# EAGLE board PIC32 (EAGLE 8.1.0)
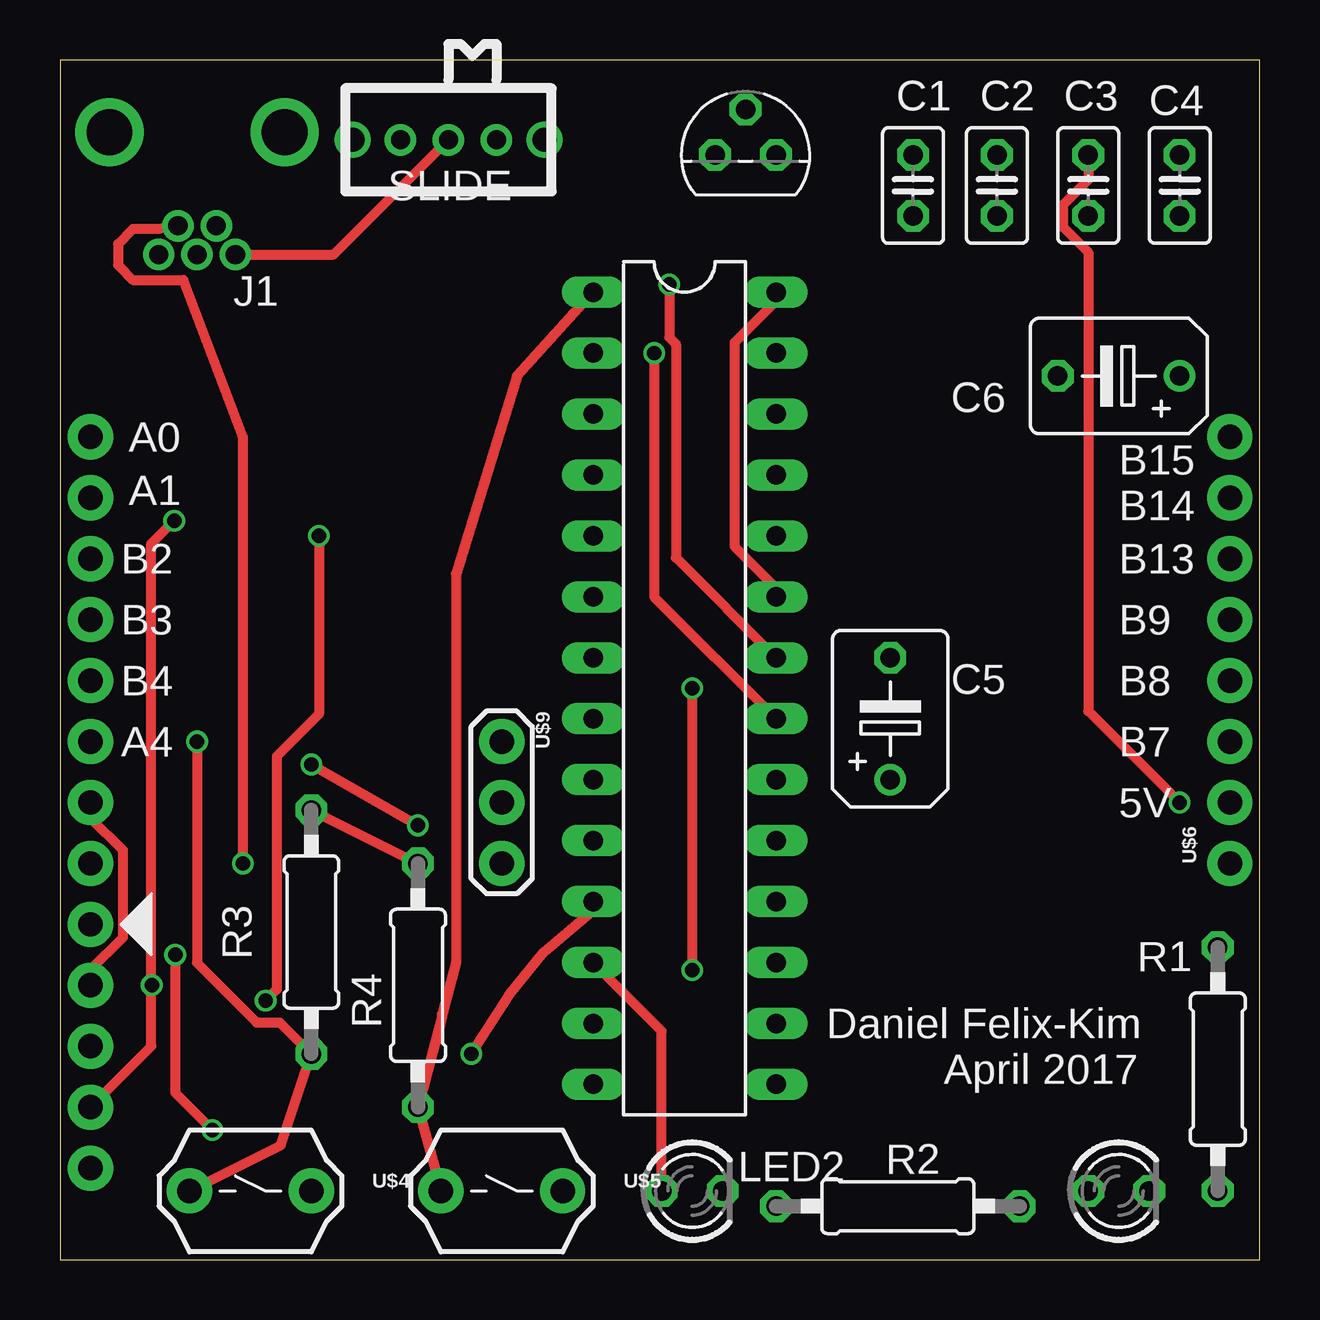
[diagram p0: board, top side]
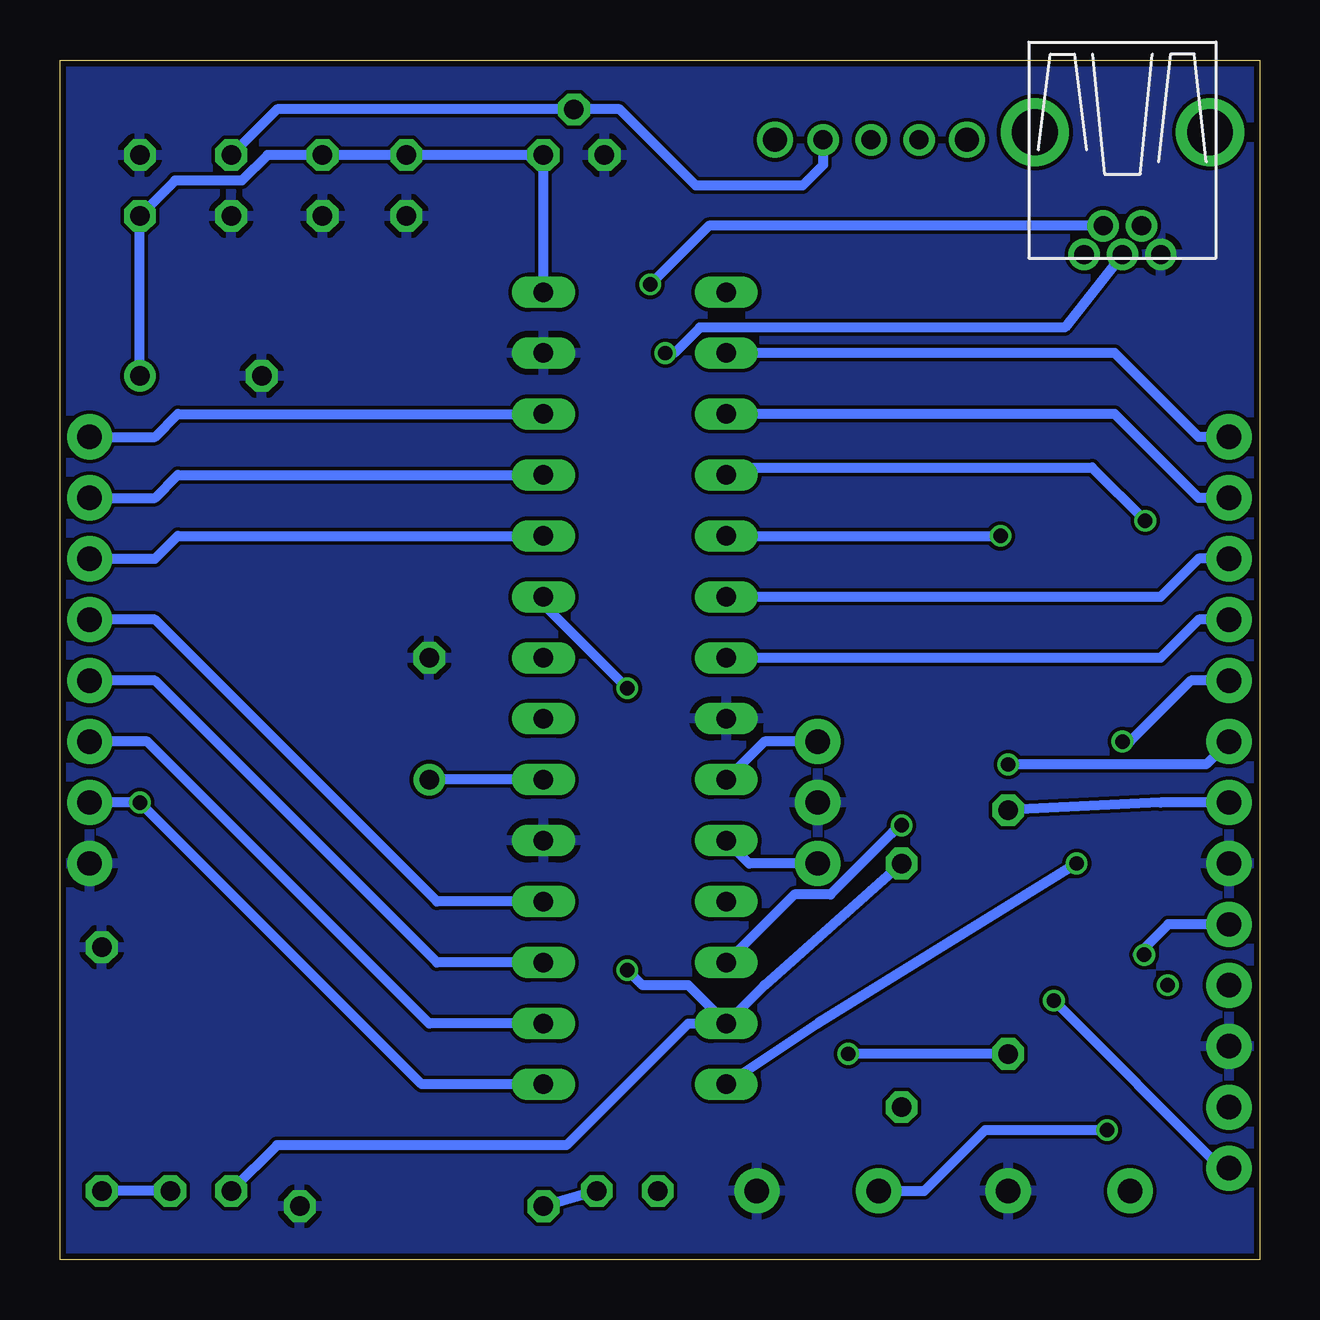
[diagram p1: board, bottom side, seen from below]

Size 50 x 50 mm. Coordinates in mm from the lower left corner, seen from the top.
Outline: 0,0 50,0 50,50 0,50 0,0
Copper layers (1*16): Top 0.035mm / dielectric 1.5mm / Bottom 0.035mm
Design rules "SeeedStudio_2layer_DRU_no_angle_20140221": minimum track width 6mil, minimum drill 12mil, track to track 6mil, track to pad 6mil, pad to pad 6mil, via to via 6mil, smd to smd 0mil, copper to edge 10mil, drill to drill 10mil, minimum pad ring 10mil, minimum via ring 6mil, stop-mask expansion 2mil, vias tented up to drill 100mil, thermal gap 10mil

## Footprints (pad centres in the part's own frame; a part is rotated, then mirrored left to right if it is on the bottom)
C025-025X050 = drill 0.813 octagon: 1 -1.27,0; 2 1.27,0
B45181B = drill 0.813: + -2.54,0 | drill 0.813 octagon: - 2.54,0
USB-MB-H = drill 0.8: D+ 5.1,0; D- 3.9,0.8; GND 5.1,-1.6; ID 3.9,-0.8; VBUS 5.1,1.6 | drill 1.9: P$6 0,-3.65; P$7 0,3.65
LED3MM = drill 0.813 octagon: A -1.27,0; K 1.27,0
0207/10 = drill 0.813 octagon: 1 -5.08,0; 2 5.08,0
DIL28-3 = drill 0.813 long: 1 -16.51,-3.81; 2 -13.97,-3.81; 3 -11.43,-3.81; 4 -8.89,-3.81; 5 -6.35,-3.81; 6 -3.81,-3.81; 7 -1.27,-3.81; 8 1.27,-3.81; 9 3.81,-3.81; 10 6.35,-3.81; 11 8.89,-3.81; 12 11.43,-3.81; 13 13.97,-3.81; 14 16.51,-3.81; 15 16.51,3.81; 16 13.97,3.81; 17 11.43,3.81; 18 8.89,3.81; 19 6.35,3.81; 20 3.81,3.81; 21 1.27,3.81; 22 -1.27,3.81; 23 -3.81,3.81; 24 -6.35,3.81; 25 -8.89,3.81; 26 -11.43,3.81; 27 -13.97,3.81; 28 -16.51,3.81
SLIDE = drill 0.8: 1 -2,0; 2 0,0; 3 2,0 | drill 1: P$1 -4,0; P$2 4,0
TO92 = drill 0.813 octagon: 1 -1.27,0; 2 0,1.905; 3 1.27,0
PB = drill 1.016 pad 1.88: 1 -2.54,0; 2 2.54,0
1X08 = drill 1.016 pad 1.88: 1 0,0; 2 2.54,0; 3 5.08,0; 4 7.62,0; 5 10.16,0; 6 12.7,0; 7 15.24,0; 8 17.78,0
1X05 = drill 1.016 pad 1.88: 1 0,0; 2 2.54,0; 3 5.08,0; 4 7.62,0; 5 10.16,0
OSC = drill 1.016 pad 1.88: 1 -2.54,0; 2 0,0; 3 2.54,0

## Placement (x,y rotation side)
C1  0.1uF  [C025-025X050]  35.56,44.77 270 top
C2  0.1uF  [C025-025X050]  39.05,44.77 270 top
C3  0.1uF  [C025-025X050]  42.86,44.77 270 top
C4  0.1uF  [C025-025X050]  46.67,44.77 90 top
C5  10uF  [B45181B]  34.61,22.54 90 top
C6  10uF  [B45181B]  44.13,36.83 180 top
J1  USB-MB-H  [USB-MB-H]  5.71,46.99 270 top
LED1  RED  [LED3MM]  44.13,2.86 0 top
LED2  GREEN  [LED3MM]  26.35,2.86 0 top
R1  330  [0207/10]  48.26,7.94 270 top
R2  330  [0207/10]  34.92,2.22 180 top
R3  10k  [0207/10]  10.48,13.65 90 top
R4  10k  [0207/10]  14.92,11.43 90 top
U$1  PIC32MX250F128B  [DIL28-3]  26.04,23.81 270 top
U$2  SLIDE  [SLIDE]  16.19,46.67 0 top
U$3  MCP1702  [TO92]  28.57,46.04 0 top
U$4  USER  [PB]  7.94,2.86 0 top
U$5  RESET  [PB]  18.41,2.86 0 top
U$6  CONN_081  [1X08]  48.77,16.51 90 top
U$7  CONN_081  [1X08]  1.27,16.51 90 top
U$8  PICKIT3  [1X05]  1.27,13.97 270 top
U$9  8MHz  [OSC]  18.41,19.05 270 top

## Library data of the parts
C1-C6 J1 R1-R4 U$1-U$9 = PIC32
LED1 LED2 = led

## Nets
+3V3: C1.1 C2.1 C4.1 C6.+ LED1.A R3.2 R4.2 U$1.13 U$1.23 U$1.28 U$3.3 U$7.2 U$8.2
+5V: C3.1 U$1.15 U$2.3 U$3.2 U$6.2
A0: U$1.2 U$7.8
A1: U$1.3 U$7.7
A4/LED: LED2.A U$1.12 U$7.3
B2: U$1.6 U$7.6
B3: U$1.7 U$7.5
B4/USER: R3.1 U$1.11 U$4.1 U$7.4
B7: U$1.16 U$6.3
B8: U$1.17 U$6.4
B9: U$1.18 U$6.5
B13: U$1.24 U$6.6
B14: U$1.25 U$6.7
B15: U$1.26 U$6.8
D+: J1.D+ U$1.21
D-: J1.D- U$1.22
GND: C1.2 C2.2 C3.2 C4.2 C5.- C6.- J1.GND R1.1 R2.1 U$1.8 U$1.19 U$1.27 U$3.1 U$4.2 U$5.2 U$6.1 U$7.1 U$8.3 U$9.2
MCLR: R4.1 U$1.1 U$5.1 U$8.1
N$1: J1.VBUS U$2.2
N$2: LED2.K R2.2
N$3: C5.+ U$1.20
N$5: LED1.K R1.2
N$6: U$1.9 U$9.1
N$7: U$1.10 U$9.3
PGC: U$1.5 U$8.5
PGD: U$1.4 U$8.4
USBID: J1.ID U$1.14

## Tracks (layer width: path | path; a pad name or v marks a point on that pad's centre or on a via)
+3V3  (via drill 0.6)
  Top 0.406: v26.35,23.81 v26.35,12.06 | U$1.28 29.84,39.95 28.12,38.22 28.12,29.72 29.84,27.99 U$1.23 | R3.2 R4.2 | U$7.2 1.27,18.41 2.62,17.07 2.62,13.41 1.27,12.07 U$8.2
  Bottom 0.406: U$1.13 23.81,9.84 28.89,4.76 40.96,4.76 LED1.A | 30.48,46.04 U$3.3 | 30.48,46.04 C1.1 C2.1 41.35,46.04 42.42,44.97 45.2,44.97 C4.1 C6.+ | U$1.28 29.84,45.4 30.48,46.04 | U$7.2 4.13,19.05 R3.2 | R4.2 20.64,11.43 U$1.13 | 29.84,27.25 U$1.23 29.84,27.3 v26.35,23.81 | U$1.13 23.81,11.43 25.72,11.43 v26.35,12.06
+5V  (via drill 0.6)
  Top 0.406: v46.67,19.05 42.86,22.86 42.86,41.99 41.8,43.06 41.8,43.94 42.86,45.01 C3.1
  Bottom 0.406: U$1.15 34.92,7.3 v46.67,19.05 U$6.2 | U$2.3 18.19,45.62 19.05,44.77 23.5,44.77 26.67,47.94 U$3.2 40.96,47.94 C3.1
A0
  Bottom 0.406: U$7.8 2.54,34.29 6.03,37.78 U$1.2
A1
  Bottom 0.406: U$7.7 2.54,31.75 6.03,35.24 U$1.3
A4/LED  (via drill 0.6)
  Top 0.406: LED2.A 25.08,9.53 U$1.12 | v10.48,20.64 v14.92,18.1
  Bottom 0.406: U$7.3 2.22,20.64 v10.48,20.64 | U$1.12 19.39,15.21 17.88,15.21 15.31,17.78 v14.92,18.1
B2
  Bottom 0.406: U$7.6 2.54,29.21 4.13,27.62 U$1.6
B3
  Bottom 0.406: U$7.5 2.54,26.67 4.13,25.08 U$1.7
B4/USER  (via drill 0.6)
  Top 0.406: U$1.11 22.23,14.55 20.18,12.82 18.73,11.06 v17.14,8.57 | 5.71,3.17 U$4.1 9.21,4.76 R3.1 9.16,9.88 8.2,9.88 5.71,12.37 v5.71,21.59
  Bottom 0.406: R3.1 v17.14,8.57 | U$7.4 2.86,24.13 5.4,21.59 v5.71,21.59
B7
  Bottom 0.406: U$1.16 34.61,9.84 46.35,21.59 U$6.3
B8
  Bottom 0.406: U$1.17 34.29,12.38 46.04,24.13 U$6.4
B9
  Bottom 0.406: U$6.5 46.04,26.67 34.29,14.92 U$1.18
B13
  Bottom 0.406: U$6.6 46.04,29.21 45.09,30.16 U$1.24
B14
  Bottom 0.406: U$6.7 46.04,31.75 45.09,32.7 U$1.25
B15
  Bottom 0.406: U$6.8 46.04,34.29 45.09,35.24 U$1.26
D+  (via drill 0.6)
  Top 0.406: v24.77,37.78 24.77,27.62 U$1.21
  Bottom 0.406: J1.D+ 8.12,38.85 23.33,38.85 24.39,37.78 v24.77,37.78
D-  (via drill 0.6)
  Top 0.406: v25.4,40.64 25.4,38.43 25.68,38.16 25.68,29.25 U$1.22
  Bottom 0.406: J1.D- 22.95,43.09 v25.4,40.64
GND
  pour Bottom: 0,0 50.16,0 50.16,50.16 0,50.16
MCLR  (via drill 0.6)
  Top 0.406: U$5.1 R4.1 15.92,10.13 15.92,10.22 15.95,10.25 16.51,12.38 16.51,28.57 19.05,36.83 U$1.1 | v4.8,12.7 4.8,6.94 v6.35,5.4
  Bottom 0.406: U$5.1 13.97,2.86 11.43,5.4 v6.35,5.4 | U$8.1 3.81,13.97 5.08,12.7 v4.8,12.7
N$1
  Top 0.406: J1.VBUS 11.41,41.89 U$2.2
N$2
  Bottom 0.406: LED2.K R2.2
N$3
  Bottom 0.406: U$1.20 C5.+
N$5
  Bottom 0.406: LED1.K R1.2
N$6
  Bottom 0.406: U$9.1 20.64,21.59 U$1.9
N$7
  Bottom 0.406: U$9.3 21.27,16.51 U$1.10
PGC  (via drill 0.6)
  Top 0.406: v10.79,30.16 10.79,22.73 9.03,20.97 9.03,11.26 v8.57,10.79
  Bottom 0.406: U$1.5 v10.79,30.16 | U$8.5 1.59,3.81 v8.57,10.79
PGD  (via drill 0.6)
  Top 0.406: v4.76,30.8 3.81,29.84 3.81,11.44 | 3.81,11.43 3.81,11.44 | 3.81,11.44 v3.83,11.44 | U$8.4 3.81,8.89 3.81,11.44
  Bottom 0.406: U$1.4 21.91,33.02 6.99,33.02 v4.76,30.8
USBID  (via drill 0.6)
  Top 0.406: J1.ID 4.14,42.95 3.04,42.95 2.42,42.33 2.42,41.45 3.04,40.83 5.14,40.83 7.62,34.29 v7.62,16.51
  Bottom 0.406: v7.62,16.51 18.41,9.84 U$1.14

## Text on the board
tPlace: A0 | B15 | A1 | B14 | B2 | B13 | B3 | B9 | B4 | B8 | A4 | B7 | 5V | Daniel Felix-Kim | April 2017